# Altium PCB PowerManagement_neg5V.PcbDoc
Units mm, origin at the board's own origin, x right, y up, seen from the top; angles counter-clockwise.
Board outline 99.82 x 99.82 mm, 2 copper layers (Top Layer, Bottom Layer); 91 components, 34 nets, 201 pads, 70 vias.
Unrouted connection lines stored in the file: 29.
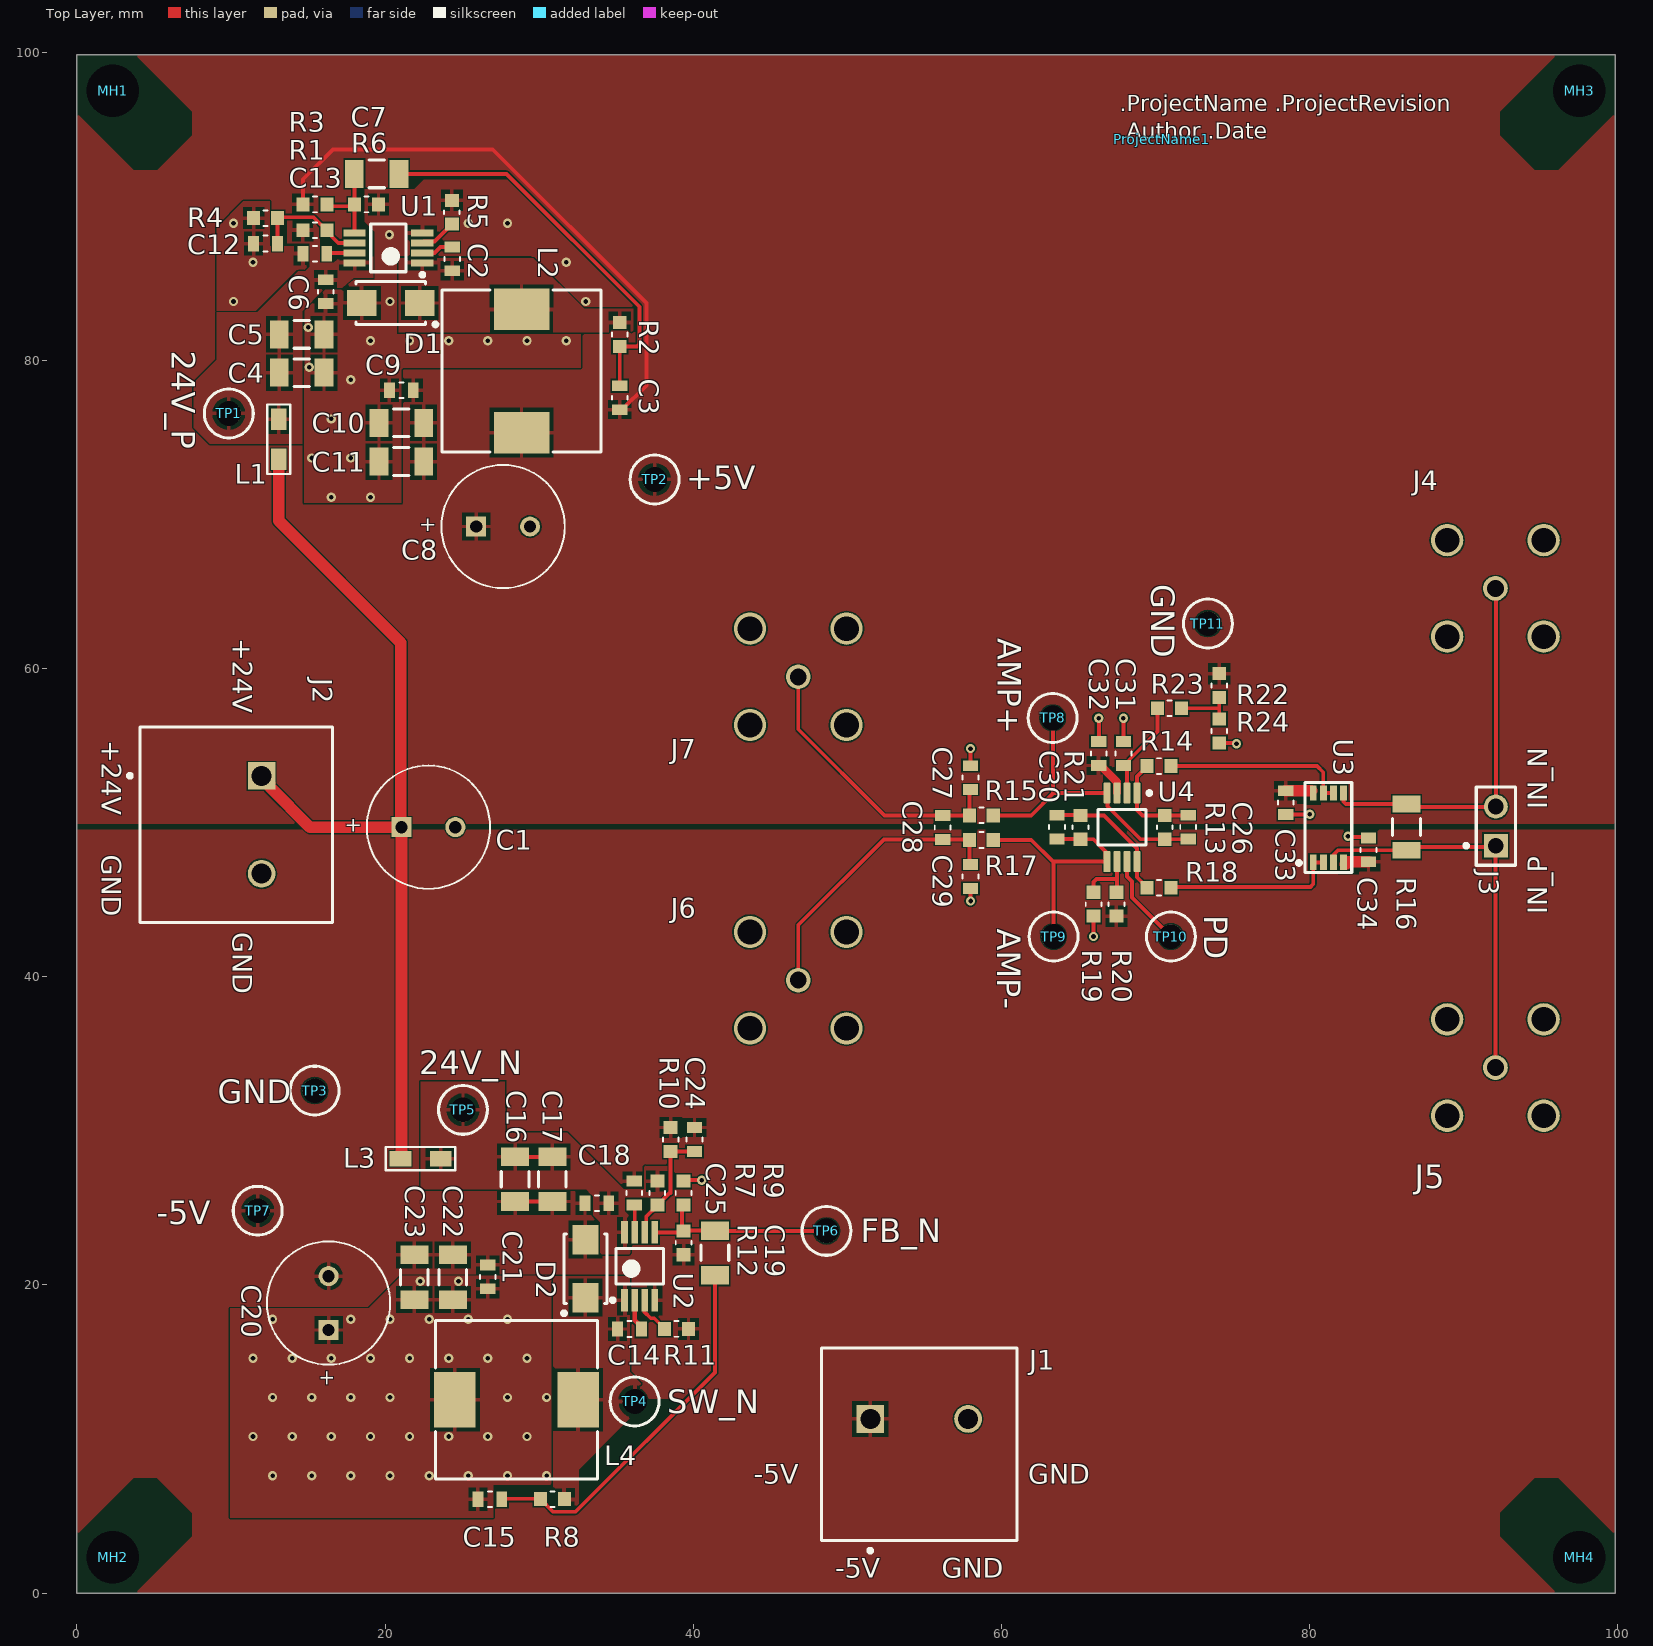
[diagram p0: Top Layer view]
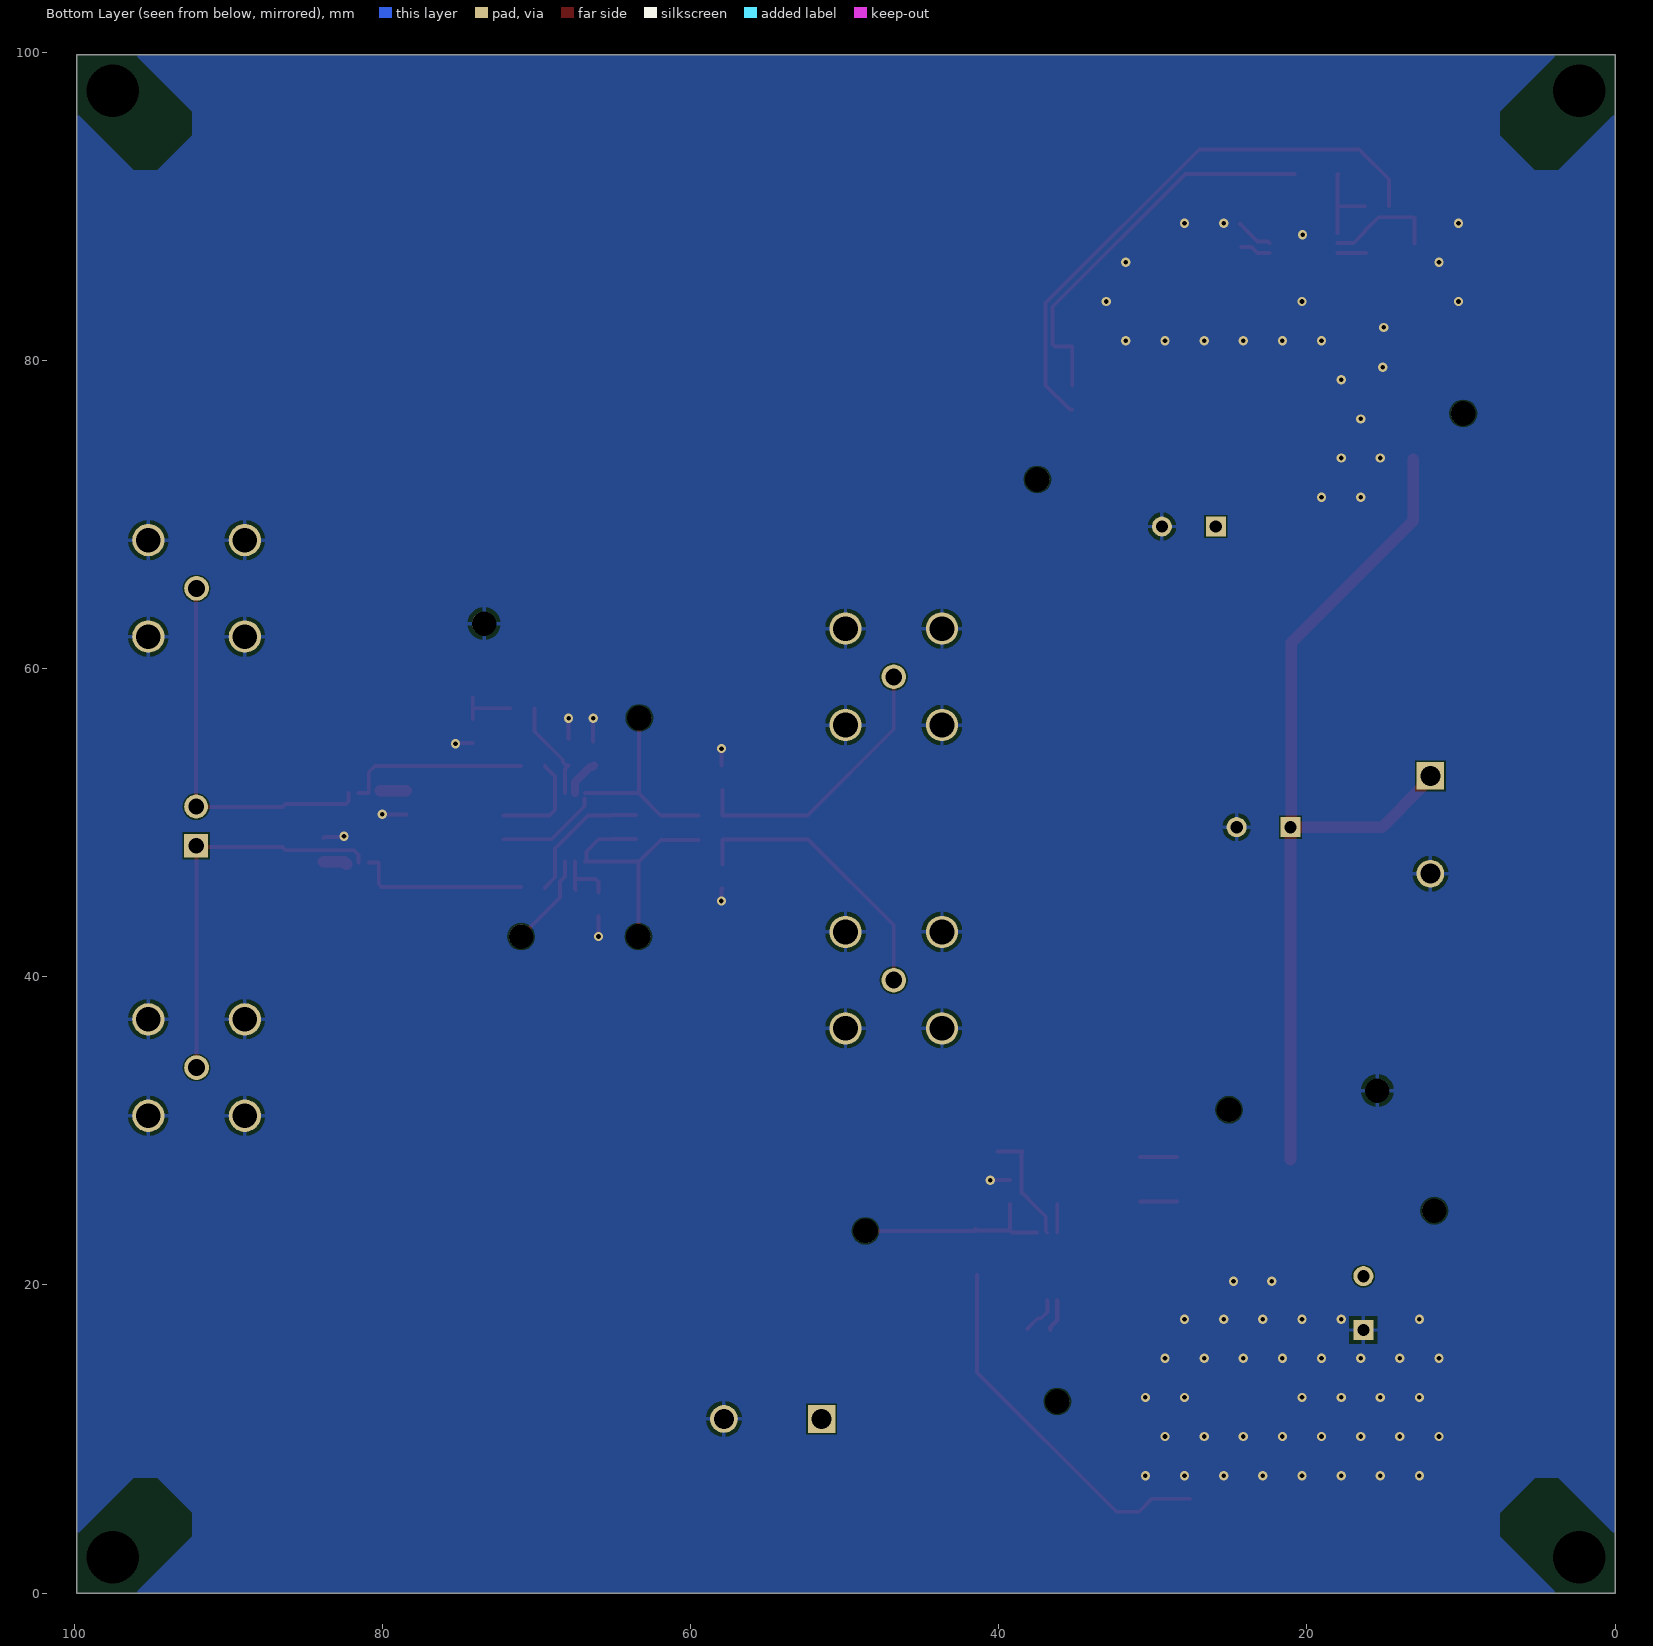
[diagram p1: Bottom Layer view, seen from below]
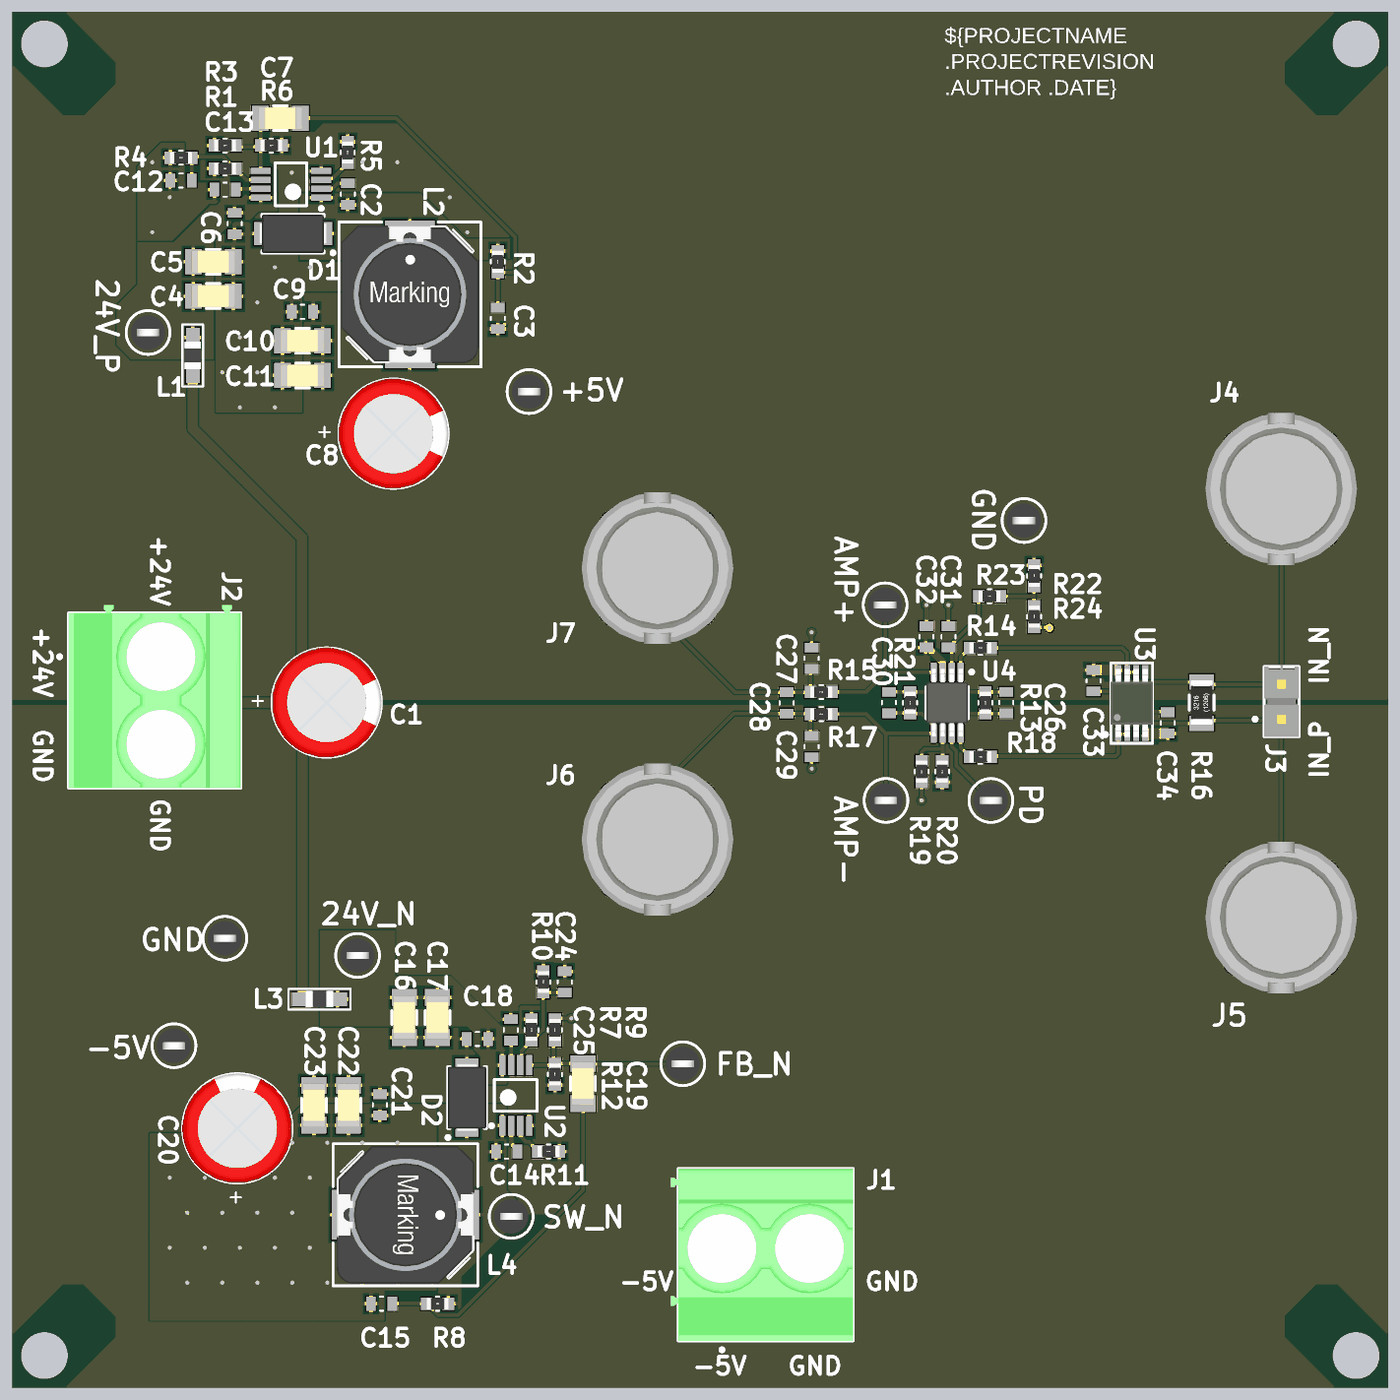
[diagram p2: 3D render of the assembled board from above, using the file's embedded part models]

## Layer stack, top to bottom
Top Solder: solder mask 0.0102, Solder Resist, Dk 3.5
Top Layer: signal copper 0.0356
Dielectric 1: dielectric 0.32, FR-4, Dk 4.8
Bottom Layer: signal copper 0.0356
Bottom Solder: solder mask 0.0102, Solder Resist, Dk 3.5

## Board outline
0,0 99.822,0 99.822,99.822 0,99.822

## Design rules (kind name [scope] priority, off if disabled: settings)
Clearance [All] p1: gap=0.089 ignorepadtopadclearanceinfootprint=FALSE except(0: Arc-Text Arc-Hole Track-Text Track-Hole SMDPad-Text SMDPad-Hole THPad-Text THPad-Hole Via-Text Via-Hole Fill-Text Fill-Hole Poly-Text Poly-Hole Region-Text Region-Hole Text-Text Text-Hole; 0.127: Arc-Via Track-Via SMDPad-Via THPad-Via Via-Via)
DiffPairsRouting [All] p1: maxlimit=0.254 minlimit=0.089 mostfreqgap=0.178 toplayer_minwidth=0.089 toplayer_maxwidth=0.381 toplayer_prefwidth=0.254 bottomlayer_minwidth=0.089 bottomlayer_maxwidth=0.381 bottomlayer_prefwidth=0.254 maxuncoupledlength=12.7
HoleSize [All] p1: absolutevalues=TRUE maxlimit=6.3 minlimit=0.2 maxpercent=80.000 minpercent=20.000
MatchedLengths [All] p1 off: tolerance=0.254 checknetsindiffpair=TRUE checkdiffpairvsdiffpair=FALSE checkxsignals=FALSE checkothers=FALSE
MinimumSolderMaskSliver [All] p1: minsoldermaskwidth=0.089
PlaneConnect [All] p1: pad.planeconnectstyle=Relief pad.reliefexpansion=0.508 pad.reliefentries=4 pad.reliefconductorwidth=0.254 pad.reliefairgap=0.254 via.planeconnectstyle=Direct via.reliefexpansion=0.508 via.reliefentries=4 via.reliefconductorwidth=0.254 via.reliefairgap=0.254
PolygonConnect [All] p1: thpad.connectstyle=Relief thpad.reliefconductorwidth=0.254 thpad.reliefentries=4 thpad.polygonreliefangle="90 Angle" thpad.airgapwidth=0.254 smdpad.connectstyle=Relief smdpad.reliefconductorwidth=0.254 smdpad.reliefentries=4 smdpad.polygonreliefangle="90 Angle" smdpad.airgapwidth=0.254 via.connectstyle=Direct via.reliefconductorwidth=0.254 via.reliefentries=4 via.polygonreliefangle="90 Angle" via.airgapwidth=0.254
RoutingVias [All] p1: holewidth=0.3 width=0.601 viastyle="Through Hole" minholewidth=0.2 minwidth=0.45 maxholewidth=0.8 maxwidth=1.6
SilkToSilkClearance [All] p1: silktosilkclearance=0
SilkToSolderMaskClearance [IsPad] p1: minsilkscreentomaskgap=0 clearancetoexposedcopper=TRUE
SolderMaskExpansion [All] p1: expansion=0.102 istentingtop=FALSE
Width [All] p1: maxlimit=0.762 minlimit=0.089 preferedwidth=0.254
24 further rules are at their usual default settings.

## Classes and differential pairs
component class PowerSupply: C1 C2 C3 C4 C5 C6 C7 C8 C9 C10 C11 C12 C13 C14 C15 C16 C17 C18 C19 C20 C21 C22 C23 C24 C25 D1 D2 L1 L2 L3 L4 R1 R2 R3 R4 R5 R6 R7 R8 R9 R10 R11 R12 TP1 TP2 TP3 TP4 TP5 TP6 TP7 U1 U2
component class PCBdesign: J1 J2 J3 J4 J5 J6 J7 MH1 MH2 MH3 MH4 ProjectName1
component class Amplifier: C26 C27 C28 C29 C30 C31 C32 C33 C34 R13 R14 R15 R16 R17 R18 R19 R20 R21 R22 R23 R24 TP8 TP9 TP10 TP11 U3 U4
differential pair ADC_IN: +ADC_IN_P -ADC_IN_N
differential pair Buffer: +Buffer_P -Buffer_N
differential pair ext_IN: +ext_IN_P -ext_IN_N
differential pair OUT: +OUT_P -OUT_N
differential pair FB: +FB_P -FB_N

## Components (designator, comment, footprint, x,y, rotation, side; value= is the part's Value field where it differs from the comment)
C1 "220µF" WCAP-ATG5_8x11.5x3.5 22.812,49.708 r180 top value="220 µF"
C2 "10nF" CAPC1608X07N 24.359,86.589 r270 top
C3 "7.5nF" CAPC1608X07N 35.23,77.576 r90 top
C4 "10µF" C_1206 14.587,79.197 r0 top
C5 "10µF" C_1206 14.587,81.685 r0 top
C6 "100nF" CAPC1608X07N 16.142,84.455 r270 top
C7 "0.027µF" C_1206 19.456,92.1 r180 top
C8 "220µF" WCAP-ATG5_8x11.5x3.5 27.658,69.215 r180 top value="220 µF"
C9 "100nF" CAPC1608X07N 21.057,78.054 r0 top
C10 "47µF" C_1206 21.057,75.946 r180 top
C11 "47µF" C_1206 21.057,73.431 r180 top
C12 "1µF" CAPC1608X07N 12.243,87.579 r180 top
C13 "1µF" CAPC1608X07N 15.443,86.919 r180 top
C14 "10nF" CAPC1608X07N 35.865,17.14 r0 top
C15 "7.5nF" CAPC1608X07N 26.797,6.096 r0 top
C16 "10µF" C_1206 28.438,26.862 r270 top
C17 "10µF" C_1206 30.851,26.862 r270 top
C18 "100nF" CAPC1608X07N 33.746,25.307 r180 top
C19 "0.027µF" C_1206 41.402,22.073 r270 top
C20 "220µF" WCAP-ATG5_8x11.5x3.5 16.332,18.821 r270 top value="220 µF"
C21 "100nF" CAPC1608X07N 26.67,20.523 r270 top
C22 "47µF" C_1206 24.397,20.498 r90 top
C23 "47µF" C_1206 21.895,20.498 r90 top
C24 "1µF" CAPC1608X07N 40.081,29.439 r90 top
C25 "1µF" CAPC1608X07N 36.17,25.96 r90 top
C26 "56pF" CAPC1608X07N 72.111,49.708 r270 top
C27 "680pF" CAPC1608X07N 57.988,52.921 r270 top
C28 "470pF" CAPC1608X07N 56.178,49.684 r270 top
C29 "680pF" CAPC1608X07N 57.988,46.507 r270 top
C30 "56pF" CAPC1608X07N 63.602,49.708 r270 top
C31 "100nF" CAPC1608X07N 67.92,54.483 r90 top
C32 "100nF" CAPC1608X07N 66.319,54.483 r90 top
C33 "100nF" CAPC1608X07N 78.441,51.296 r270 top
C34 "100nF" CAPC1608X07N 83.82,48.235 r270 top
D1 "BYS12-90" DIOM4227X23N 20.396,83.744 r180 top
D2 "BYS12-90" DIOM4227X23N 33.02,21.031 r90 top
J1 "1714955" PHOE-1714955_V 54.661,11.303 r0 top
J2 "1714955" PHOE-1714955_V 11.989,49.86 r270 top
J3 "TSW-102-07-S-S" SMTC-TSW-102-07-S-S 92.081,49.773 r90 top
J4 "5-1634503-1" TECO-5-1634503-1_V 92.056,65.202 r0 top
J5 "5-1634503-1" TECO-5-1634503-1_V 92.056,34.106 r0 top
J6 "5-1634503-1" TECO-5-1634503-1_V 46.812,39.776 r0 top
J7 "5-1634503-1" TECO-5-1634503-1_V 46.812,59.461 r0 top
L1 "600Ω" "WE-CBF_0805_High Current" 13.095,74.879 r90 top
L2 "150µH" SMT_inductor_1050_Performance 28.854,79.312 r0 top
L3 "600Ω" "WE-CBF_0805_High Current" 22.301,28.194 r0 top
L4 "150µH" SMT_inductor_1050_Performance 28.524,12.548 r270 top
MH1 "mounting hole 3,4mm" MH_3.4 2.337,97.485 r0 top
MH2 "mounting hole 3,4mm" MH_3.4 2.337,2.337 r0 top
MH3 "mounting hole 3,4mm" MH_3.4 97.485,97.485 r0 top
MH4 "mounting hole 3,4mm" MH_3.4 97.485,2.337 r0 top
ProjectName1 "Project Name, Rev" ID_ProjectRev 70.409,94.361 r0 top
R1 "162k" RESC1608X06N 15.443,88.443 r0 top
R2 "75k" RESC1608X06N 35.23,81.686 r270 top
R3 "1k" RESC1608X06N 15.443,90.119 r180 top
R4 "dnp" RESC1608X06N 12.243,89.23 r0 top
R5 "133k" RESC1608X06N 24.333,89.611 r270 top
R6 "1k" RESC1608X06N 18.796,90.119 r180 top
R7 "162k" RESC1608X06N 37.668,25.959 r90 top
R8 "75k" RESC1608X06N 30.861,6.096 r0 top
R9 "1k" RESC1608X06N 39.37,25.959 r270 top
R10 "dnp" RESC1608X06N 38.532,29.439 r270 top
R11 "133k" RESC1608X06N 38.913,17.145 r180 top
R12 "1k" RESC1608X06N 39.37,22.733 r270 top
R13 "1k" RESC1608X06N 70.592,49.696 r270 top
R14 "1k" RESC1608X06N 70.231,53.67 r180 top
R15 "24R9" RESC1608X06N 58.693,50.471 r180 top
R16 "dnp" RESC3216X65N 86.284,49.708 r90 top
R17 "24R9" RESC1608X06N 58.693,48.871 r180 top
R18 "1k" RESC1608X06N 70.231,45.771 r180 top
R19 "0R" RESC1608X06N 65.977,44.704 r90 top
R20 "dnp" RESC1608X06N 67.462,44.704 r90 top
R21 "1k" RESC1608X06N 65.131,49.696 r270 top
R22 "10k" RESC1608X06N 74.134,58.896 r270 top
R23 "dnp" RESC1608X06N 70.898,57.421 r0 top
R24 "10k" RESC1608X06N 74.134,55.938 r270 top
TP1 "24V_P" TP_5006 9.855,76.556 r90 top
TP2 "+5V" TP_5006 37.491,72.271 r90 top
TP3 "GND" TP_5006 15.428,32.609 r90 top
TP4 "SW_N" TP_5006 36.195,12.438 r90 top
TP5 "24V_N" TP_5006 25.054,31.363 r90 top
TP6 "FB_N" TP_5006 48.644,23.508 r90 top
TP7 "-5V" TP_5006 11.735,24.816 r90 top
TP8 "AMP+" TP_5006 63.322,56.794 r90 top
TP9 "AMP-" TP_5006 63.384,42.609 r90 top
TP10 "PD" TP_5006 70.992,42.605 r90 top
TP11 "GND" TP_5006 73.395,62.916 r90 top
U1 "LM5007" TSOP65P490X110-8N 20.218,87.3 r180 top
U2 "LM5007" TSOP65P490X110-8N 36.525,21.209 r90 top
U3 "LT6203" MSOP8_3x3-8N 81.21,49.671 r90 top
U4 "THS4521" DGK0008A_N 67.824,49.696 r270 top

## Footprints (in the part's own frame and the unit in brackets; to place one, negate y for a bottom-side part, rotate by r counter-clockwise, add the part's x,y. Pads: shape width x height; smd on the part's side, far side on the other; paste and mask are expansions set on the pad)
C_1206 [mm]
  rect 1.21x1.82 smd: 1(1.45,0) 2(-1.45,0)
  silkscreen extent -0.5,-0.9 0.5,0.9, body extent -1.6,-0.81 1.6,0.81, height 1.82
CAPC1608X07N [mm] "Chip Capacitor, 2-Leads, Body 1,60x0,80mm, IPC Medium Density"
  rect 0.7x1 smd: 1(-0.775,0) 2(0.775,0)
  silkscreen extent -0.13,-0.51 0.13,0.51, body extent -0.88,-0.48 0.88,0.47, height 0.7
DGK0008A_N [mm] "TSOP, 8-Leads, Body 3.1x3.1mm, Pitch 0.65mm, IPC Medium Density"
  rrect22% 1.35x0.45 smd: 1(-2.225,0.975) 2(-2.225,0.325) 3(-2.225,-0.325) 4(-2.225,-0.975) 5(2.225,-0.975) 6(2.225,-0.325) 7(2.225,0.325) 8(2.225,0.975)
  silkscreen extent -2.35,-1.55 1.15,1.9, body extent -2.45,-1.5 2.45,1.5, height 0.94
DIOM4227X23N [mm] "Molded Diode, 2-Leads, Body 4,25x2,67mm, IPC Medium Density"
  rect 1.92x1.68 smd: 1(-1.854,0.023) 2(1.906,0.023)
  silkscreen extent -3,-1.38 2.28,1.54, body extent -2.44,-1.37 2.5,1.42, height 2.29
ID_ProjectRev [mm] "project name + revision number"
MH_3.4 [mm]
  round 3.1 hole 3.4 unplated: 1(0,0)
MSOP8_3x3-8N [mm] "TSOP, 8-Leads, Body 3,00x3,00mm, Pitch 0,65mm, IPC Medium Density"
  rect 1x0.45 smd mask+0.051: 1(-2.25,0.975) 2(-2.25,0.325) 3(-2.25,-0.325) 4(-2.25,-0.975) 5(2.25,-0.975) 6(2.25,-0.325) 7(2.25,0.325) 8(2.25,0.975)
  silkscreen extent -2.92,-1.52 2.92,2.03, body extent -2.47,-1.55 2.47,1.55, height 1.1
PHOE-1714955_V [mm] "Terminal Block, 2-Leads, Body 12.7x12.5mm, Pitch 6.35mm"
  rect 1.8x1.8 hole 1.3: 1(-3.175,0)
  round 1.8 hole 1.3: 2(3.175,0)
  silkscreen extent -6.35,-8.67 6.35,4.6, body extent -6.92,-7.9 6.35,4.6, height 21.51
RESC1608X06N [mm] "Chip Resistor, 2-Leads, Body 1,60x0,80mm, IPC Medium Density"
  rect 0.85x0.9 smd: 1(-0.775,0) 2(0.775,0)
  silkscreen extent -0.13,-0.51 0.13,0.51, body extent -0.8,-0.4 0.8,0.4, height 0.44
RESC3216X65N [mm] "Vishay D1206 3.2 x 1.6 (+/- 0.15), 0.2mm - 0.6mm Kontakte"
  rect 1.1x1.8 smd: 1(-1.5,0) 2(1.5,0)
  silkscreen extent -0.55,-0.9 0.55,0.9, body extent -1.6,-0.8 1.6,0.8, height 0.55
SMT_inductor_1050_Performance [mm] "SMD Shielded Power Inductor, 2-leads, body 10.3x10.5mm"
  rect 3.6x2.7 smd: 1(0,4) 2(0,-4)
  silkscreen extent -5.15,-5.25 5.15,5.25, body extent -5,-5 5,5, height 4.79
SMTC-TSW-102-07-S-S [mm] "Header, 2-Leads, Body 5.08x2.54mm, Pitch 2.54mm"
  rect 1.55x1.55 hole 1.02: 1(-1.27,0)
  round 1.55 hole 1.02: 2(1.27,0)
  silkscreen extent -2.54,-1.27 2.54,2.04, body extent -2.54,-1.27 2.67,1.27, height 8.38
TECO-5-1634503-1_V [mm] "THD, 5-Leads,Dia 11mm, Pitch 3.13mm"
  round 1.6 hole 1.1: 1(0,0)
  round 2.1 hole 1.6: 2(-3.13,3.13) 3(-3.13,-3.13) 4(3.13,-3.13) 5(3.13,3.13)
  body extent -5.5,-5.51 5.5,5.51, height 13.7
TP_5006 [mm] "Test Point, Through Hole, Dia 3.18mm"
  round 1.55 hole 1.6: 1(0,0)
  silkscreen extent -1.58,-1.59 1.58,1.59, body extent -1.24,-1.24 1.25,1.25, height 4.62
TSOP65P490X110-8N [mm] "TSOP, 8-Leads, Body 3,00x3,00mm, Pitch 0,65mm, IPC Medium Density"
  rect 1.45x0.45 smd: 1(-2.2,0.975) 2(-2.2,0.325) 3(-2.2,-0.325) 4(-2.2,-0.975) 5(2.2,-0.975) 6(2.2,-0.325) 7(2.2,0.325) 8(2.2,0.975)
  silkscreen extent -2.33,-1.55 1.15,1.87, body extent -1.55,-1.55 1.55,1.55, height 1.1
WCAP-ATG5_8x11.5x3.5 [mm] "Aluminum Electrolytic Capacitors, 8x11.5mm"
  rect 1.3x1.3 hole 0.8: 1(1.75,0)
  round 1.3 hole 0.8: 2(-1.75,0)
  silkscreen extent -4,-4 4,4, body extent -3.99,-4 4,4, height 11.81
"WE-CBF_0805_High Current" [mm] "SMD EMI Suppression Ferrite  Bead, body 2.0mmx1.2mm"
  rect 1.4x1 smd: 1(-1.3,0) 2(1.3,0)
  silkscreen extent -2.25,-0.75 2.25,0.75, body extent -1,-0.6 1,0.6, height 0.93

## Part data
C1 C20: library part 860020574012, "WCAP-ATG5 Aluminum Electrolytic Capacitors, 8x11.5mm, 35 Vdc, 220 uF", Operating Temperature="-40 °C up to +105 °C", Supplier Part Number 1=710-860020574012, Voltage="35 Vdc", ComponentLink1Description=Manufacturer, ComponentLink1URL=http://www.we-online.de, ComponentLink2Description=Datasheet, ComponentLink2URL=http://katalog.we-online.com/pbs/datasheet/860020574012.pdf, Life Cycle=2000h, MF="Würth Elektronik", MPN=860020574012, Part Number=860020574012, Size=8x11.5mm, Supplier 1=Mouser
C2 C14: library part Cap_0603, Dielectric=X7R, MPN=885012206065, Package=0603, Supplier Part Number 1=710-885012206065, Voltage=25V, MF=Würth, Supplier 1=Mouser, Supplier 2=Digi-Key, Supplier Part Number 2=732-7983-1-ND
C3 C15: library part Cap_0603, Dielectric=C0G, MPN=C0603C752J3GACTU, Package=0603, Supplier Part Number 1=80-C0603C752J3GACTU, Tolerance=5%, Voltage=25V, MF=KEMET, Supplier 1=Mouser
C4 C5 C16 C17: library part C_1206, "Capacitor 1206", Dielectric=X6S, MPN=GRT31CC8YA106KE01L, Package=1206, Supplier Part Number 1=81-GRT31CC8YA106KE1L, Tolerance=10%, Voltage=35V, MF="Murata Electronics", Supplier 1=Mouser
C6 C31 C32 C33 C34: library part Cap_0603, Dielectric=X7R, MPN=885012206071, Package=0603, Supplier Part Number 1=710-885012206071, Voltage=25V, MF=Würth, Supplier 1=Mouser
  C6: Supplier 2=Digi-Key, Supplier Part Number 2=732-7989-1-ND
C7 C19: library part C_1206, "Capacitor 1206", Dielectric=C0G, MPN=GRM3195C1H273JA01D, Package=1206, Supplier Part Number 1=81-GRM315C1H273JA01D, Tolerance=5%, Voltage=50V, MF="Murata Electronics", Supplier 1=Mouser
C8: library part 860020574012, "WCAP-ATG5 Aluminum Electrolytic Capacitors, 8x11.5mm, 35 Vdc, 220 uF", Operating Temperature="-40 °C up to +105 °C", Supplier Part Number 1=710-860020574012, Voltage=35Vdc, ComponentLink1Description=Manufacturer, ComponentLink1URL=http://www.we-online.de, ComponentLink2Description=Datasheet, ComponentLink2URL=http://katalog.we-online.com/pbs/datasheet/860020574012.pdf, Life Cycle=2000h, MF="Würth Elektronik", MPN=860020574012, Part Number=860020574012, Size=8x11.5mm, Supplier 1=Mouser
C9 C21: library part Cap_0603, Dielectric=X7R, MPN=885012206071, Package=0603, Supplier Part Number 1=710-885012206071, Tolerance=10%, Voltage=25V, MF=Würth, Supplier 1=Mouser
C10 C11 C22 C23: library part C_1206, "Capacitor 1206", Dielectric=X5R, MPN=GRM31CR61A476ME15L, Package=1206, Supplier Part Number 1=81-GRM31CR61A476ME5L, Tolerance=20%, Voltage=10V, MF="Murata Electronics", Supplier 1=Mouser
C12 C13 C24 C25: library part Cap_0603, Dielectric=X5R, MPN=GRT188R61H105KE13D, Package=0603, Supplier Part Number 1=81-GRT188R61H105KE3D, Voltage=50V, MF="Murata Electronics", Supplier 1=Mouser, Supplier 2=Digi-Key, Supplier Part Number 2=490-12330-1-ND
C18: library part Cap_0603, Dielectric=X7R, MPN=GMK107B7104KAHT, Package=0603, Supplier Part Number 1=963-GMK107B7104KAHT, Tolerance=10%, Voltage=35V, MF="Taiyo Yuden", Supplier 1=Mouser, Supplier 2=Digi-Key, Supplier Part Number 2=587-3354-1-ND
C26 C30: library part Cap_0603, Dielectric=C0G, MPN=VJ0603A560JXACW1BC, Package=0603, Supplier Part Number 1=77-VJ0603A560JXACBC, Voltage=50V, MF=Vishay, Supplier 1=Mouser
C27 C29: library part Cap_0603, Dielectric=C0G, MPN=VJ0603A681GXJCW1BC, Package=0603, Supplier Part Number 1=77-VJ0603A681GXJCBC, Voltage=16V, MF=Vishay, Supplier 1=Mouser
C28: library part Cap_0603, Dielectric=C0G, MPN=VJ0603A471JXJCW1BC, Package=0603, Supplier Part Number 1=77-VJ0603A471JXJCBC, Voltage=16V, MF=Vishay, Supplier 1=Mouser
D1 D2: "Schottky Diode", Forward Voltage=750mV, MPN=BYS12-90-E3/TR3, Package=DO-214AC, Rated Current=1.5A, Reverse Voltage=90V, Supplier Part Number 1=2889144, MF=Vishay, Supplier 1=Farnell, Supplier 2=Mouser, Supplier 3=Digi-Key, Supplier Part Number 2=625-BYS12-90-E3/TR3, Supplier Part Number 3=BYS12-90-E3/GICT-ND
J1 J2: "Conn Terminal Blocks 2 POS 6.35mm Solder ST Thru-Hole 32A", Color=Green, Current=30A, Current Rating=32A, Flammability Rating="UL94 V-0", Manufacturer="Phoenix Contact", Max Supply Voltage=500V, Package Quantity=50, Supplier Part Number 1=651-1714955, Voltage=300V, Voltage Rating=630V, Approvals=UL,CSA,cULus, Category="Terminal Blocks", ComponentLink1Description=https://datasheet.ciiva.com/16071/1714955-16071953.pdf?src-supplier=Onlinecomponents.com, ComponentLink1URL=https://datasheet.ciiva.com/16071/1714955-16071953.pdf?src-supplier=Onlinecomponents.com, ComponentLink2Description=https://datasheet.ciiva.com/824/1714955-824307.pdf?src-supplier=Digi-Key, ComponentLink2URL=https://datasheet.ciiva.com/824/1714955-824307.pdf?src-supplier=Digi-Key, ComponentLink3Description=https://datasheet.ciiva.com/1120/100944-1120389.pdf?src-supplier=Farnell, ComponentLink3URL=https://datasheet.ciiva.com/1120/100944-1120389.pdf?src-supplier=Farnell, ComponentLink4Description=https://datasheet.ciiva.com/15169/getdatasheetpartid-177883-15169653.pdf?src-supplier=Verical, ComponentLink4URL=https://datasheet.ciiva.com/15169/getdatasheetpartid-177883-15169653.pdf?src-supplier=Verical, ComponentLink5Description=https://datasheet.ciiva.com/1118/100944-1118422.pdf?src-supplier=Element14, ComponentLink5URL=https://datasheet.ciiva.com/1118/100944-1118422.pdf?src-supplier=Element14, ComponentLink6Description=https://datasheet.ciiva.com/14607/70054427-14607514.pdf?src-supplier=Allied+Electronics, ComponentLink6URL=https://datasheet.ciiva.com/14607/70054427-14607514.pdf?src-supplier=Allied+Electronics, ComponentLink7Description=https://datasheet.ciiva.com/29218/744545-da-01-en-printklemme-mkds-5-2-6-35-29218282.pdf?src-supplier=Conrad, ComponentLink7URL=https://datasheet.ciiva.com/29218/744545-da-01-en-printklemme-mkds-5-2-6-35-29218282.pdf?src-supplier=Conrad, Connector Type="PCB,Terminal Block", Contact Material=Tin, Depth=12.5mm, Gender=Male, Height=26.6mm, Housing Color=Green, Housing Material=Polyamide, Insulation Material=Nylon, Lead Free="Lead Free", Length=12.7mm, Manufacturer Part Number=1714955, Material=Polyamide, Max Current Rating=32A, Mount="Through Hole", Number of Circuits=2, Number of Contacts=2, Number of Levels=1, Number of Pins=2, Number of Poles=2, Number of Positions=2, Number of Positions Per Level=2, Number of Rows=1, Orientation=Straight, Packaging=Bulk, Pitch=6.35mm, Radiation Hardening=No, REACH SVHC="No SVHC", RoHS=Yes, Stock 1=477, Stripping Length=8mm, Supplier 1=Mouser, Termination=Screw, Weight=0.197534oz, Width=26.6mm, Wire Gauge (Max)=24AWG, Wire Gauge (Min)=10AWG, Wire/Cable Gauge=24AWG
J3: "SAMTEC         TSW-102-07-S-S             CONNECTOR, HEADER, 2 POSITION, 1ROW, 2.54MM", Color=Black, Manufacturer=Samtec, Max Current Rating=7.6A, Max Operating Temperature=125°C, Max Voltage Rating (AC)=550V, Min Operating Temperature=-55°C, Package Quantity=1, Supplier Part Number 1=200-TSW10207SS, Category="Headers and Wire Housings", ComponentLink1Description=https://datasheet.ciiva.com/28366/1796313-28366300.pdf?src-supplier=Element14, ComponentLink1URL=https://datasheet.ciiva.com/28366/1796313-28366300.pdf?src-supplier=Element14, ComponentLink2Description=https://datasheet.ciiva.com/16734/htsw-th-16734222.pdf?src-supplier=Avnet+Europe, ComponentLink2URL=https://datasheet.ciiva.com/16734/htsw-th-16734222.pdf?src-supplier=Avnet+Europe, Connector Type="Male Pin", Contact Material=Bronze, Contact Mating Length=0.23inch, Contact Plating=Gold, Depth=2.54mm, Gender=Male, Housing Color=Black, Housing Material=Polyester, Lead Free="Lead Free", Length=5.08mm, Manufacturer Part Number=TSW-102-07-S-S, Mount="Through Hole", Number of Contacts=2, Number of Positions=2, Number of Rows=1, Orientation=Straight, Packaging=Bulk, Pitch=2.54mm, Radiation Hardening=No, REACH SVHC="No SVHC", RoHS=Yes, Stock 1=9923, Supplier 1=Mouser, Termination=Solder, Width=2.54mm
J4 J5 J6 J7: "BNC Str PCB Skt 50Ohm Nickel Pltd", Dielectric Material=Polymethylpentene, Frequency=4GHz, Insulation Resistance=5GR, Manufacturer="TE Connectivity", Max Operating Temperature=185°C, Min Operating Temperature=-67°C, Package Quantity=100, Supplier Part Number 1=571-5-1634503-1, Body Material=Zinc, Body Plating=Nickel, Category="RF / Coaxial Connectors", ComponentLink1Description=https://datasheet.ciiva.com/9421/eng-cd-1634503-c-9421987.pdf?src-supplier=Avnet, ComponentLink1URL=https://datasheet.ciiva.com/9421/eng-cd-1634503-c-9421987.pdf?src-supplier=Avnet, ComponentLink2Description=https://datasheet.ciiva.com/642/eng-cd-1634503-e-642757.pdf?src-supplier=Digi-Key, ComponentLink2URL=https://datasheet.ciiva.com/642/eng-cd-1634503-e-642757.pdf?src-supplier=Digi-Key, ComponentLink3Description=https://datasheet.ciiva.com/30141/eng-cd-1634503-c-30141260.pdf?src-supplier=Onlinecomponents.com, ComponentLink3URL=https://datasheet.ciiva.com/30141/eng-cd-1634503-c-30141260.pdf?src-supplier=Onlinecomponents.com, ComponentLink4Description=https://datasheet.ciiva.com/11762/0900766b806ccb99-11762655.pdf?src-supplier=RSComponents, ComponentLink4URL=https://datasheet.ciiva.com/11762/0900766b806ccb99-11762655.pdf?src-supplier=RSComponents, ComponentLink5Description=https://datasheet.ciiva.com/1448/1663562-1448576.pdf?src-supplier=Element14, ComponentLink5URL=https://datasheet.ciiva.com/1448/1663562-1448576.pdf?src-supplier=Element14, ComponentLink6Description=https://datasheet.ciiva.com/16652/eng-cd-1634503-c-16652893.pdf?src-supplier=Avnet+Europe, ComponentLink6URL=https://datasheet.ciiva.com/16652/eng-cd-1634503-c-16652893.pdf?src-supplier=Avnet+Europe, Connector System=Cable-to-Board, Connector Type=BNC,Jack, Contact Material=Bronze, Contact Plating=Gold, Depth=11mm, ELV=Compliant, Fastening Type=Bayonet, Gender=Female, Impedance=50R, Insulation Material=Polymethylpentene, Length=13.7mm, Manufacturer Part Number=5-1634503-1, Max Frequency=4GHz, Mount="Through Hole,PCB", Number of Positions=1, Orientation=Straight, Packaging=Box, PCB Mount Retention=With, PCB Thickness=0.126inch, Polarity=Standard,Normal, Radiation Hardening=No, REACH SVHC="No SVHC", RoHS=Yes, Sealable="No (Without)", Stock 1=5615, Supplier 1=Mouser, Tail Length=0.177inch, Termination=Solder
L1: library part "WE-CBF, 742792040", "WE-CBF SMD EMI Suppression Ferrite Bead, 0805, 600Ω", MPN=742792040, Supplier Part Number 1=2761567, ComponentLink1Description=Manufacturer, ComponentLink1URL=http://www.we-online.de, ComponentLink2Description=Datasheet, ComponentLink2URL=http://katalog.we-online.de/pbs/datasheet/742792040.pdf, MF="Würth Elektronik", Size=0805, Supplier 1=Farnell, Supplier 2=Mouser, Supplier 3=Digi-Key, Supplier Part Number 2=710-742792040, Supplier Part Number 3=732-1620-1-ND, Type="High Current"
L2 L4: library part B82464G4154M, "SMT power Inductor, 150uH, 320m DRC", Rated Current="0.85 A", Supplier Part Number 1=871-B82464G4154M, Tolerance=20%, DCR=320m, MF="EPCOS / TDK", MPN=B82464G4154M, Supplier 1=Mouser
L3: library part "WE-CBF, 742792040", "WE-CBF SMD EMI Suppression Ferrite Bead, 0805, 600Ω", MPN=742792040, Supplier Part Number 1=1635735, ComponentLink1Description=Manufacturer, ComponentLink1URL=http://www.we-online.de, ComponentLink2Description=Datasheet, ComponentLink2URL=http://katalog.we-online.de/pbs/datasheet/742792040.pdf, MF="Wurth Elektronik", Size=0805, Supplier 1=Farnell, Supplier 2=Mouser, Supplier 3=Digi-Key, Supplier Part Number 2=710-742792040, Supplier Part Number 3=732-1620-1-ND, Type="High Current"
MH1 MH2 MH3 MH4: library part "Mounting Hole", "Non plated through hole, 3.4mm"
ProjectName1: library part ID_ProjectRev, "Project Name and Revision Number", Created=2018_11_23_AGeiger
R1 R7: library part R_0603, MPN=CR0603-FX-1623ELF, Package=0603, Supplier Part Number 1=652-CR0603-FX1623ELF, MF=Bourns, Supplier 1=Mouser
R2 R8: library part R_0603, MPN=AC0603FR-1375KL, Package=0603, Supplier Part Number 1=603-AC0603FR-1375KL, MF=Yageo, Supplier 1=Mouser
R3 R6 R9 R12: library part R_0603, MPN=CRCW06031K00JNEAC, Package=0603, Supplier Part Number 1=71-CRCW06031K00JNEAC, Tolerance=5%, MF="Vishay / Dale", Supplier 1=Mouser
R4 R10 R20 R23: library part R_0603, Package=0603
R5 R11: library part R_0603, MPN=CR0603-FX-1333ELF, Package=0603, Supplier Part Number 1=652-CR0603FX-1333ELF, MF=Bourns, Supplier 1=Mouser
R13 R14 R18 R21: library part R_0603, MPN=CRCW06031K00JNEAC, Package=0603, Supplier Part Number 1=71-CRCW06031K00JNEAC, MF="Vishay / Dale", Supplier 1=Mouser
R15 R17: library part R_0603, MPN=RC0603FR-1324R9L, Package=0603, Supplier Part Number 1=603-RC0603FR-1324R9L, MF=Yageo, Supplier 1=Mouser
R16: library part R_1206, "WID SMD 1M 5% 0,25W", Case=1206, MPN=APC1206B200RN, possilbeValue=200R, Supplier Part Number 1=284-APC1206B200RN, Tolerance=5%, AN=22757, MF=ARCOL/Ohmite, Mixed=SMT, Preferred=Yes, Supplier 1=Mouser, Technology=TK100
R19: library part R_0603, MPN=CRCW06030000Z0EBC, Package=0603, Supplier Part Number 1=71-CRCW06030000Z0EBC, MF="Vishay / Dale", Supplier 1=Mouser
R22 R24: library part R_0603, MPN=CRCW060310K0FKEAC, Package=0603, Supplier Part Number 1=71-CRCW060310K0FKEAC, MF="Vishay / Dale", Supplier 1=Mouser
TP1 TP2 TP3 TP4 TP5 TP6 TP7 TP8 TP9 TP10 TP11: library part 5006, "Test Point;  Compact;  THM;  PC;  .350 L;  .125 OD;  Heat Resistant Nylon 46;  Black", Color=Black, Flammability Rating="UL94 V-0", Manufacturer="Keystone Electronics", Package Quantity=100, Supplier Part Number 1=534-5006, Body Material=PBT, Category=Connectors, ComponentLink1Description=https://datasheet.ciiva.com/1123/m60-2p60-1123808.pdf?src-supplier=Newark, ComponentLink1URL=https://datasheet.ciiva.com/1123/m60-2p60-1123808.pdf?src-supplier=Newark, ComponentLink2Description=https://datasheet.ciiva.com/1454/1718283-1454829.pdf?src-supplier=Element14, ComponentLink2URL=https://datasheet.ciiva.com/1454/1718283-1454829.pdf?src-supplier=Element14, ComponentLink3Description=https://datasheet.ciiva.com/11744/0900766b8009b7c7-11744947.pdf?src-supplier=RSComponents, ComponentLink3URL=https://datasheet.ciiva.com/11744/0900766b8009b7c7-11744947.pdf?src-supplier=RSComponents, ComponentLink4Description=https://datasheet.ciiva.com/2917/m60-2p60-2917629.pdf?src-supplier=Digi-Key, ComponentLink4URL=https://datasheet.ciiva.com/2917/m60-2p60-2917629.pdf?src-supplier=Digi-Key, ComponentLink5Description=https://datasheet.ciiva.com/16883/70182825-16883963.pdf?src-supplier=Allied+Electronics, ComponentLink5URL=https://datasheet.ciiva.com/16883/70182825-16883963.pdf?src-supplier=Allied+Electronics, Contact Material=Bronze, Contact Plating=Tin,Silver, Height=0.35inch, Hole Diameter=1.6mm, Housing Color=Black, Inside Diameter=1.78mm, Lead Free="Lead Free", Length=8.89mm, Manufacturer Part Number=5006, Material=Nylon,Bronze,Silver, Mount="PCB,Through Hole", Number of Ports=1, Orientation=Straight, Outside Diameter=3.18mm, Packaging=Bulk, Plating=Silver, REACH SVHC="No SVHC", RoHS=Yes, Stock 1=203116, Supplier 1=Mouser
U1 U2: "Buck Converter, 9-75Vin, 2.5-73Vout", MPN=LM5007MM/NOPB, Package=VSSOP-8, Supplier Part Number 1=3007210, MF="Texas Instruments", Supplier 1=Farnell, Supplier 2=Mouser, Supplier 3=Digi-Key, Supplier Part Number 2=926-LM5007MM/NOPB, Supplier Part Number 3=296-LM5007MM/NOPBCT-ND
U3: library part LT6203_MSOP8, "2 Ch Low Noise, Low Power OpAmp", MPN=LT6203CMS8#PBF, Package=MSOP-8, Supplier Part Number 1=584-LT6203CMS8#PBF, Created=Kreppel_20190830, MF="Analog Devices / Linear Technology", Supplier 1=Mouser
U4: library part THS4521IDGKR, "IC AMP RRO NEG OUT VLP 8VSSOP (Single Channel fully differential Amplifier)", Case/Package=VSSOP, Input Bias Current=900nA, Input Offset Voltage (Vos)=2mV, Manufacturer="Texas Instruments", Max Dual Supply Voltage=2.75V, Max Operating Temperature=85°C, Max Supply Voltage=5.5V, Min Dual Supply Voltage=1.5V, Min Operating Temperature=-40°C, Min Supply Voltage=2.5V, Nominal Supply Current=1.14mA, Operating Supply Voltage=5V, Output Current per Channel=55mA, Package Quantity=2500, Power Supply Rejection Ratio (PSRR)=80dB, Supplier Part Number 1=595-THS4521IDGKR, Voltage Gain=119dB, -3db Bandwidth=145MHz, Bandwidth=145MHz, Category="Amplifiers - Op Amps, Buffer, Instrumentation", Common Mode Rejection Ratio=80dB, ComponentLink1Description=https://datasheet.ciiva.com/14456/sbos458f-14456592.pdf?src-supplier=Avnet, ComponentLink1URL=https://datasheet.ciiva.com/14456/sbos458f-14456592.pdf?src-supplier=Avnet, ComponentLink2Description=https://datasheet.ciiva.com/18622/ths4521-18622155.pdf?src-supplier=Digi-Key, ComponentLink2URL=https://datasheet.ciiva.com/18622/ths4521-18622155.pdf?src-supplier=Digi-Key, ComponentLink3Description=https://datasheet.ciiva.com/18622/ths4521-18622156.pdf?src-supplier=Digi-Key, ComponentLink3URL=https://datasheet.ciiva.com/18622/ths4521-18622156.pdf?src-supplier=Digi-Key, ComponentLink4Description=https://datasheet.ciiva.com/18622/ths4521-18622157.pdf?src-supplier=Digi-Key, ComponentLink4URL=https://datasheet.ciiva.com/18622/ths4521-18622157.pdf?src-supplier=Digi-Key, Gain Bandwidth Product=95MHz, Lead Free="Lead Free", Manufacturer Part Number=THS4521IDGKR, Max I/O Voltage=2mV, Number of Amplifiers=1, Number of Channels=1, Number of Circuits=1, Number of Elements=1, Number of Pins=8, Operating Supply Current=1.14mA, Packaging="Tape and Reel", Pricing 1="1=2,55000, 10=2,29000, 25=2,16000, 100=1,78000, 250=1,59000, 500=1,54000, 1000=1,28000, 2500=1,25000, 1=2,83000, 10=2,54000, 25=2,40000, 100=1,98000, 250=1,77000, 500=1,71000 (EUR)", Radiation Hardening=No, REACH SVHC="No SVHC", RoHS=Yes, Slew Rate=490V/µs, Stock 1=12114, Supplier 1=Mouser, Unity Gain Bandwidth Product=95MHz, Weight=0.000935oz

## Via types
v1: diameter 0.601, hole 0.3, Top Layer to Bottom Layer, tented both sides, 69 vias
v2: diameter 0.601, hole 0.3, Top Layer to Bottom Layer, 1 vias

## Nets (pads, with @x,y where several pads share a name; then routed paths per layer and width w, separated by ;. In a path a pad name is that pad's centre, name@x,y a point inside that pad or via, vN(x,y) a via of type N, cw(c..) or ccw(c..) an arc to the next point about the centre after c; other vN are vias at no path point)
24V_N: C16.2 C17.2 C18.1 L3.2 R7.2 TP5.1 U2.8 | length 2.4
  Top Layer w0.254: C16.2 C17.2
24V_P: C4.2 C5.2 C6.1 L1.2 R1.1 TP1.1 U1.8
+5V: C3.1 C8.1 C9.2 C10.2 C11.2 C32.1 C33.1 L2.2 R3.2 R22.1 TP2.1 U3.8 U4.3 | length 40.8
  Top Layer w0.254: R3.2@14.671,90.003 14.671,91.75 16.612,93.69 26.989,93.69 36.957,83.722 36.957,78.378 35.38,76.801 C3.1
  Top Layer w0.508: C32.1@66.274,53.708 66.37,53.612 66.52,53.612 67.499,52.633 U4.3@67.499,51.921
  Top Layer w0.762: C33.1 U3.8@80.137,52.071
-5V: C16.1 C17.1 C18.2 C20.2 C21.1 C22.1 C23.1 C24.2 C25.2 C34.2 D2.2 J1.1 R10.1 R11.1 R12.2 R20.1 TP7.1 U2.4 U3.4 | length 4
  Top Layer w0.254: C16.1 C17.1
  Top Layer w0.762: U3.4@82.312,47.294 82.33,47.313 82.477,47.46 C34.2
ADC_IN_N: C28.2 C29.1 J6.1 R17.2 | length 18.6
  Top Layer w0.254: J6.1 46.812,43.356 52.365,48.909 C28.2 57.88,48.909 R17.2 C29.1@57.918,47.284
ADC_IN_P: C27.2 C28.1 J7.1 R15.2 | length 18.5
  Top Layer w0.254: J7.1 46.812,56.059 52.412,50.459 C28.1 57.905,50.459 R15.2 C27.2@57.918,52.135
Buffer_N: R14.1 U3.6 U3.7 | length 12
  Top Layer w0.254: R14.1 80.483,53.67 80.885,53.268 U3.7 U3.6
Buffer_P: R18.1 U3.1 U3.2 | length 11.4
  Top Layer w0.254: R18.1@71.006,45.822 80.052,45.822 80.235,46.005 80.235,46.145 U3.1 U3.2
conv_N: C1.1 J2.1 L1.1 L3.1 | length 59.2
  Top Layer w0.762: J2.1 12.508,52.516 12.508,52.322 15.122,49.708 21.012,49.708 21.012,61.675 13.095,69.591 L1.1 ; L3.1@21.062,28.134 C1.1
ext_IN_N: J3.2 J4.1 R16.2 U3.5 | length 24.8
  Top Layer w0.254: U3.5 82.198,51.908 82.198,51.357 82.347,51.208 R16.2 86.474,51.017 J3.2@92.081,51.017 ; J4.1 92.081,65.177 J3.2
ext_IN_P: J3.1 J5.1 R16.1 U3.3 | length 25.5
  Top Layer w0.254: U3.3 81.535,47.901 81.841,48.208 R16.1 86.474,48.398 86.474,48.408 92.011,48.408 92.056,48.363 J5.1
FB_N: C26.1 R13.1 R14.2 U4.1 | length 6.6
  Top Layer w0.254: R14.2 69.456,53.645 68.799,52.988 U4.1 68.799,50.817 69.145,50.471 R13.1 C26.1@72.142,50.471
FB_Neg: C19.2 R9.2 R12.1 TP6.1 U2.5 | length 13.1
  Top Layer w0.254: U2.5 39.144,23.409 R12.1@39.268,23.533 ; R9.2@39.268,25.26 R12.1@39.268,23.533 ; C19.2@41.402,23.546 41.39,23.533 R12.1@39.268,23.533 ; C19.2@41.501,23.622 C19.2 41.427,23.497 48.633,23.497 TP6.1
FB_P: C30.1 R18.2 R21.1 U4.8 | length 9
  Top Layer w0.254: C30.1@63.531,50.497 R21.1@65.131,50.497 ; R21.1 66.656,50.471 68.799,48.328 U4.8 68.799,46.453 69.456,45.796 R18.2
FB_Pos: C7.1 R3.1 R6.2 U1.5 | length 5.5
  Top Layer w0.254: R3.1@16.221,90.003 R6.2@17.869,90.003 ; C7.1@17.981,92.1 18.021,92.06 18.021,90.018 18.018,90.015 U1.5
GND: C1.2 C4.1 C5.1 C6.2 C8.2 C9.1 C10.1 C11.1 C12.2 C13.2 C15.1 C20.1 C21.2 C22.2 C23.2 C27.1 C29.2 C31.2 C32.2 C33.2 C34.1 D1.2 J1.2 J2.2 J4.2 J4.3 J4.4 J4.5 J5.2 J5.3 J5.4 J5.5 J6.2 J6.3 J6.4 J6.5 J7.2 J7.3 J7.4 J7.5 L4.2 R4.1 R5.1 R6.1 R9.1 R19.1 R24.2 TP3.1 TP11.1 U1.4 | length 11.4
  Top Layer w0.254: R9.1@39.268,26.81 R9.1@39.279,26.799 ; R9.1@39.381,26.799 v1(40.556,26.799) ; C29.2@57.918,45.734 C29.2@57.926,45.726 ; C27.1 v1(57.988,54.803) ; v1(57.996,44.912) C29.2@57.996,45.724 ; v1(65.97,42.61) 65.97,43.922 R19.1 ; C32.2 v1(66.319,56.782) ; v1(67.912,56.782) 67.912,55.426 C31.2@67.92,55.419 ; R24.2 75.202,55.163 v2(75.249,55.116) ; C33.2 79.991,50.521 v1(80.006,50.536) ; v1(82.488,49.116) 82.541,49.063 83.767,49.063 C34.1
  other v1: 12.7,7.62 15.24,7.62 17.78,7.62 20.32,7.62 22.86,7.62 25.4,7.62 27.94,7.62 30.48,7.62 11.43,10.16 13.97,10.16 16.51,10.16 19.05,10.16 21.59,10.16 24.13,10.16 26.67,10.16 29.21,10.16 12.7,12.7 15.24,12.7 17.78,12.7 20.32,12.7 27.94,12.7 30.48,12.7 11.43,15.24 13.97,15.24 16.51,15.24 19.05,15.24 21.59,15.24 24.13,15.24 26.67,15.24 29.21,15.24 12.7,17.78 17.78,17.78 20.32,17.78 22.86,17.78 25.4,17.78 27.94,17.78 22.276,20.244 24.765,20.244 16.51,71.12 19.05,71.12 15.24,73.66 17.78,73.66 16.51,76.2 17.78,78.74 15.073,79.547 19.05,81.28 21.59,81.28 24.13,81.28 26.67,81.28 29.21,81.28 31.75,81.28 15.011,82.136 10.16,83.82 20.32,83.82 33.02,83.82 11.43,86.36 31.75,86.36 20.282,88.148 10.16,88.9 25.4,88.9 27.94,88.9
NetC2_1: C2.1 U1.2 | length 2
  Top Layer w0.254: U1.2 23.22,86.975 23.609,87.364 C2.1@24.257,87.364
NetC3_2: C3.2 C7.2 R2.2 | length 25.6
  Top Layer w0.254: C7.2@20.805,92.1 27.876,92.1 36.5,83.477 36.5,81.06 36.351,80.911 R2.2 C3.2
NetC14_2: C14.2 U2.2 | length 2.1
  Top Layer w0.305: U2.2 36.2,17.709 36.665,17.244 C14.2@36.665,17.094
NetC15_2: C15.2 C19.1 R8.1 | length 24.2
  Top Layer w0.254: C15.2@27.584,6.121 30.086,6.121 R8.1 30.904,5.278 32.356,5.278 41.402,14.325 C19.1 C19.1@41.402,20.646
NetR19_2: R19.2 R20.2 U4.6 | length 4.2
  Top Layer w0.254: R19.2 65.977,46.154 66.167,46.345 67.482,46.345 67.499,46.362 ; R20.2@67.448,45.623 67.499,45.674 67.499,46.362 ; U4.6 67.499,46.362
NetR22_2: R22.2 R23.2 R24.1 | length 3.9
  Top Layer w0.254: R23.2 74.102,57.421 74.134,57.388 ; R24.1 74.134,57.388 ; R22.2 74.134,57.388
OUT_N: C30.2 R17.1 R21.2 TP9.1 U4.5 | length 17
  Top Layer w0.254: R17.1 61.935,48.871 63.335,47.471 ; TP9.1 63.384,47.422 63.335,47.471 ; C30.2@63.531,48.947 65.106,48.947 R21.2 65.962,48.921 66.751,48.133 66.751,47.569 U4.5@66.801,47.519 ; U4.5 63.335,47.471
OUT_P: C26.2 R13.2 R15.1 TP8.1 U4.4 | length 19.5
  Top Layer w0.254: R15.1 61.934,50.471 63.384,51.921 ; TP8.1 63.335,56.782 63.335,51.971 63.384,51.921 ; U4.4 63.384,51.921 ; U4.4@66.891,51.563 66.891,51.061 69.031,48.921 R13.2 C26.2@72.142,48.921
PD: TP10.1 U4.7 | length 6
  Top Layer w0.254: U4.7 68.149,46.501 68.468,46.182 68.468,45.129 TP10.1
RCL_N: R11.2 U2.3 | length 2.5
  Top Layer w0.254: U2.3 36.837,18.996 36.837,18.243 37.242,17.838 37.47,17.838 38.138,17.17 R11.2
RCL_P: R5.2 U1.3 | length 2.4
  Top Layer w0.254: U1.3 22.516,87.723 23.219,87.723 24.01,88.514 24.01,88.538 24.308,88.836 R5.2
Ron_N: C24.1 R7.1 R10.2 U2.6 | length 7.6
  Top Layer w0.254: U2.6 36.948,23.507 36.948,24.438 37.643,25.133 38.467,25.958 38.518,25.958 38.518,28.601 R10.2@38.456,28.664 ; R10.2 C24.1
Ron_P: C12.1 R1.2 R4.2 U1.6 | length 7.4
  Top Layer w0.254: C12.1 R4.2 13.072,89.284 15.351,89.284 16.218,88.417 16.218,88.392 16.218,88.367 16.96,87.625 U1.6
SW_N: C14.1 D2.1 L4.1 R8.2 TP4.1 U2.1
SW_P: C2.2 D1.1 L2.1 R2.1 U1.1
VCC_N: C25.1 U2.7 | length 1.9
  Top Layer w0.254: U2.7 C25.1@36.2,25.26
VCC_P: C13.1 U1.7 | length 1.9
  Top Layer w0.254: C13.1@16.148,86.966 16.157,86.975 U1.7
VOCM: C31.1 R23.1 U4.2 | length 6.6
  Top Layer w0.254: C31.1 C31.1@67.926,53.708 ; U4.2 68.149,53.485 C31.1@67.926,53.708 ; R23.1 70.123,55.911 68.293,54.081 68.293,53.931 68.07,53.708 C31.1@67.926,53.708
pads on no net: MH1.1 MH2.1 MH3.1 MH4.1

## Polygon pours and split planes (outlines as drawn)
-5V on Top Layer "-5V_L01_P046" (solid, remove dead copper, pour order 46): 0,3.81 3.684,7.494 5.19,7.494 7.497,5.186 7.497,3.683 3.814,0 96.012,0 92.329,3.683 92.329,5.207 94.615,7.493 96.139,7.493 99.822,3.81 99.822,49.531 0,49.531
SW_N on Top Layer "SW_N_L01_P018" (solid, pour order 18): 32.562,8.02 36.64,12.098 36.64,13.581 35.865,14.356 35.865,20.571 30.915,20.571 30.912,5.257 32.215,5.258 32.562,5.256
+5V on Top Layer "+5V_L01_P047" (solid, remove dead copper, pour order 47): 99.821,96.007 96.143,92.329 94.615,92.329 92.329,94.615 92.329,96.139 96.012,99.822 3.81,99.822 7.497,96.135 7.497,94.619 5.206,92.328 3.684,92.328 0,96.012 0,49.911 99.822,49.911
GND on Top Layer "GND_L01_P031" (solid, remove dead copper, pour order 31): 12.51,90.31 12.51,87.409 15.052,87.409 15.052,86.164 14.768,85.875 14.27,85.875 11.619,83.224 9.071,83.224 9.07,87.912 9.068,88.581 10.797,90.31
GND on Top Layer "GND_L01_P028" (solid, remove dead copper, pour order 28): 9.957,4.877 27.008,4.877 27.008,7.041 30.795,7.041 30.776,20.579 21.047,20.579 18.93,18.47 9.957,18.47
GND on Top Layer "GND_L01_P027" (solid, remove dead copper, pour order 27): 19.324,85.243 19.324,88.353 18.675,89.002 18.675,91.111 21.908,91.111 22.522,91.725 27.954,91.725 36.116,83.563 36.115,83.464 32.788,83.464 29.478,86.774 20.79,86.774 20.752,86.736 20.752,85.24 20.752,81.686 32.703,81.685 32.703,79.532 21.182,79.532 21.055,79.405 21.055,70.744 14.762,70.744 14.762,75.586 14.771,83.237 16.116,84.582 17.232,84.582 17.896,85.246
24V_P on Top Layer "24V_P_L01_P023" (solid, pour order 23): 11.708,83.107 9.068,83.107 9.068,80.041 7.576,78.548 7.576,75.634 8.619,74.591 14.622,74.591 14.622,75.71 14.62,83.2 16.125,84.705 17.223,84.705 17.957,85.37 19.238,85.37 19.238,86.709 17.065,86.709 16.679,86.322 15.773,86.322 15.773,88.557 15.244,89.087 13.666,89.079 13.666,87.596 15.119,87.596 15.114,86.086 14.807,85.78 14.38,85.78
24V_N on Top Layer "24V_N_L01_P022" (solid, pour order 22): 33.508,25.745 33.508,24.516 33.976,24.053 33.976,22 35.921,22 35.919,24.406 35.554,24.771 35.554,25.673 38.338,25.67 38.338,27.712 36.803,27.725 36.803,26.213 35.479,26.213 31.818,29.874 27.786,29.874 27.78,33.198 22.312,33.198 22.312,26.213 33.04,26.213
SW_P on Top Layer "SW_P_L01_P021" (solid, pour order 21): 36.119,81.814 20.888,81.814 20.876,81.826 20.876,86.641 29.615,86.641 32.918,83.337 36.116,83.337
GND on Bottom Layer "GND_L02_P045" (solid, pour order 45): 99.822,14.224 99.821,14.225 99.821,96.007 96.133,92.329 94.615,92.329 92.329,94.615 92.329,96.139 96.012,99.822 3.81,99.822 7.497,96.135 7.497,94.619 5.206,92.328 3.684,92.328 0,96.012 0,3.81 3.684,7.494 5.196,7.487 7.497,5.181 7.497,3.683 3.814,0 96.012,0 92.329,3.683 92.329,5.207 94.615,7.493 96.139,7.493 99.822,3.81

## Other copper
Top Layer:
  pour cut-out: 66.576,53.696 66.576,52.775 66.922,52.775 67.209,52.473 67.209,51.131 67.793,51.131 67.793,52.953 67.109,53.696
  pour cut-out: 83.187,47.334
  pour cut-out: 83.187,47.334
  pour cut-out: 81.864,46.659 81.864,48.007 83.185,48.007 83.186,46.661
  pour cut-out: 79.194,51.221 80.571,51.221 80.571,52.675 79.198,52.675
  pour cut-out: 37.107,12.565 39.331,12.565 32.776,6.01 32.658,6.127 32.658,8.117

## Silkscreen, mask and mechanical layers (free items; w line width, h text height)
Top Overlay:
  pour cut-out: 38.054,12.519
  pour cut-out: 37.986,13.393
  text "+24V" at 10.106,61.976 h1.27 r270
  text "+24V" at 1.6,55.347 h1.27 r270
  text "IN_N" at 95.419,50.876 h1.27 r90
  text "GND" at 1.6,47.93 h1.27 r270
  text "IN_P" at 95.419,44.057 h1.27 r90
  text "GND" at 10.106,42.901 h1.27 r270
  text "-5V" at 43.917,7.112 h1.27
  text "GND" at 61.722,7.112 h1.27
  text "-5V" at 49.225,0.991 h1.27
  text "GND" at 56.134,0.991 h1.27
Mechanical 1:
  the board outline again, w0.254

## Text inside footprints (layer, text, board x,y; h text height)
C1: Top Overlay "+" at 18.512,50.208 h1 r180
C8: Top Overlay "+" at 23.358,69.715 h1 r180
C20: Top Overlay "+" at 15.832,14.521 h1 r270